# Altium PCB PCB.PCBDOC
Units mil, origin at the board's own origin, x right, y up, seen from the top; angles counter-clockwise.
Board outline 3937.01 x 1968.5 mil, 10 copper layers (TopLayer, MidLayer1, MidLayer2, MidLayer3, MidLayer4, MidLayer5, MidLayer6, MidLayer7, MidLayer8, BottomLayer); 21 components, 20 nets, 85 pads, 0 vias.
Unrouted connection lines stored in the file: 48.
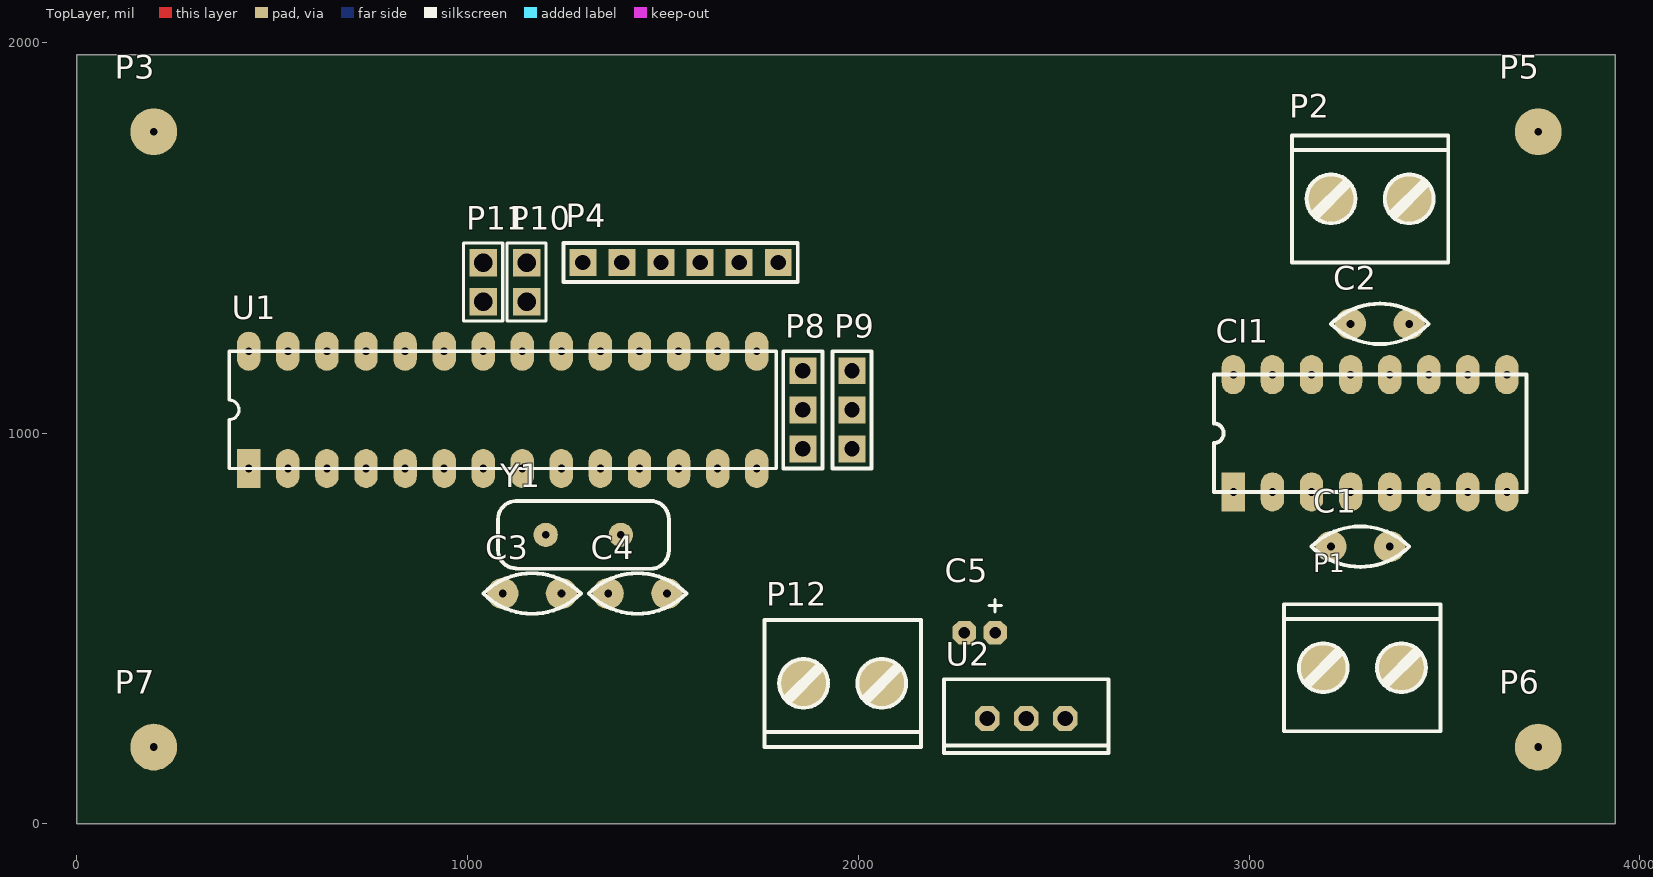
[diagram p0: TopLayer view]
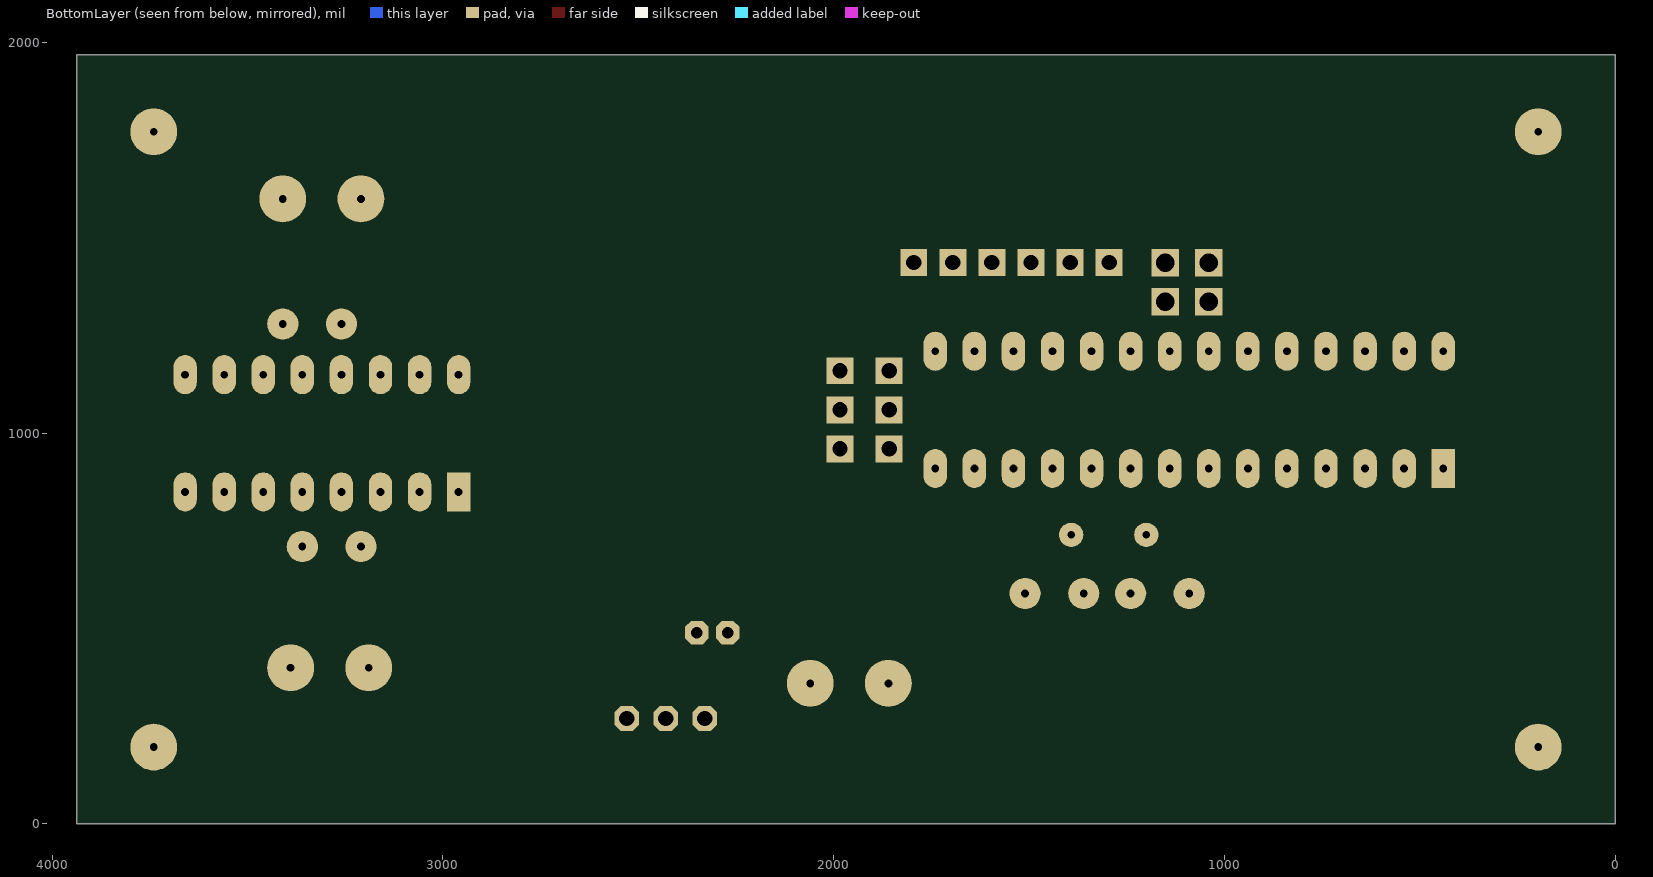
[diagram p1: BottomLayer view, seen from below]

## Layer stack, top to bottom
TopSolder: solder mask 0.4, Solder Resist, Dk 3.5
TopLayer: signal copper 1.4
Dielectric1: core 12.6, FR-4, Dk 4.8
MidLayer1: signal copper 1.4
Dielectric2: prepreg 12.6, FR-4, Dk 4.8
MidLayer2: signal copper 1.4
Dielectric3: core 12.6, FR-4, Dk 4.8
MidLayer3: signal copper 1.4
Dielectric4: prepreg 12.6, FR-4, Dk 4.8
MidLayer4: signal copper 1.4
Dielectric5: core 12.6, FR-4, Dk 4.8
MidLayer5: signal copper 1.4
Dielectric6: prepreg 12.6, FR-4, Dk 4.8
MidLayer6: signal copper 1.4
Dielectric7: core 12.6, FR-4, Dk 4.8
MidLayer7: signal copper 1.4
Dielectric8: prepreg 12.6, FR-4, Dk 4.8
MidLayer8: signal copper 1.4
Dielectric9: core 12.6, FR-4, Dk 4.8
BottomLayer: signal copper 1.4
BottomSolder: solder mask 0.4, Solder Resist, Dk 3.5

## Board outline
0,0 3937.01,0 3937.01,1968.5 0,1968.5

## Design rules (kind name [scope] priority, off if disabled: settings)
Clearance [All] p1: gap=25 ignorepadtopadclearanceinfootprint=FALSE
FabricationTestPointUsage TestPointUsage [All] p1: valid=0 allowmultiple=FALSE
FabricationTestpoint Testpoint [All] p1: side=3 testpointundercomponent=TRUE minsize=40 maxsize=100 preferedsize=60 minholesize=20 maxholesize=40 preferedholesize=32 testpointgrid=1 allowsidetop=TRUE allowsidebottom=TRUE usegrid=TRUE gridtolerance=0.01
PasteMaskExpansion PasteMaskExpansion_1 [InComponent('P1')] p1: expansion=-150
PasteMaskExpansion [All] p2: expansion=0
PlaneClearance [All] p1: clearance=10
PolygonConnect [All] p1: connectstyle=Relief reliefconductorwidth=10 reliefentries=4 polygonreliefangle="90 Angle" airgapwidth=10
RoutingVias [All] p1: holewidth=28 width=50 viastyle="Through Hole" minholewidth=28 minwidth=50 maxholewidth=28 maxwidth=50
SilkToSolderMaskClearance SilkscreenOverComponentPads [IsPad] p1: minsilkscreentomaskgap=10 clearancetoexposedcopper=TRUE
SolderMaskExpansion [All] p1: expansion=2
Width [All] p1: maxlimit=300 minlimit=20 preferedwidth=25
25 further rules are at their usual default settings.

## Components (designator, comment, footprint, x,y, rotation, side; value= is the part's Value field where it differs from the comment)
C1 "100nF" CAP0.15 3210,710 r270 top
C2 "100nF" CAP0.15 3260,1280 r270 top
C3 "22pF" CAP0.15 1240,590 r90 top
C4 "22pF" CAP0.15 1360,590 r270 top
C5 "Cap Pol" "ELECTROLITICO 5X10" 2350,490 r180 top value=220uF
CI1 "L293" DIP16 2960,850 r90 top
P1 "MOTOR1" "BORNERA2 azul" 3190,400 r0 top
P2 "MOTOR2" "BORNERA2 azul" 3210,1600 r0 top
P3 "POWER IN" TORNILLO 196.85,1771.65 r0 top
P4 "HC-05" "Header 1X6" 1795,1437 r180 top
P5 "POWER IN" TORNILLO 3740.16,1771.65 r0 top
P6 "POWER IN" TORNILLO 3740.16,196.85 r0 top
P7 "POWER IN" TORNILLO 196.85,196.85 r0 top
P8 "SERVO1" "Header 1X3" 1858,960 r90 top
P9 "SERVO2" "Header 1X3" 1984,960 r90 top
P10 "LUZ1" HEADER1X2 1151,1337 r90 top
P11 "LUZ2" HEADER1X2 1040,1337 r90 top
P12 "POWER IN" "BORNERA2 azul" 2060,360 r180 top
U1 "PIC16F876A-I/SO" DIP28 440,910 r90 top
U2 "LM78LXX" TO220 2430,270 r180 top
Y1 "5M" HP49-S 1200,740 r0 top

## Footprints (in the part's own frame and the unit in brackets; to place one, negate y for a bottom-side part, rotate by r counter-clockwise, add the part's x,y. Pads: shape width x height; smd on the part's side, far side on the other; paste and mask are expansions set on the pad)
"BORNERA2 azul" [mil]
  round 120 hole 20: 1(0,0) 2(200,0)
  silkscreen extent -100,-162 300,162, body extent -117,-122 300,178, height 394
CAP0.15 [mil]
  round 80 hole 20: 1(0,0) 2(0,150)
  silkscreen extent -52,-50 52,200, body extent -40,-22 39,172, height 267
DIP16 [mil]
  rect 100x60 hole 20: 1(0,0)
  oval 100x60 hole 20: 2(0,-100) 3(0,-200) 4(0,-300) 5(0,-400) 6(0,-500) 7(0,-600) 8(0,-700) 9(300,-700) 10(300,-600) 11(300,-500) 12(300,-400) 13(300,-300) 14(300,-200) 15(300,-100) 16(300,0)
  silkscreen extent 0,-750 300,50, body extent -2,-761 304,50, height 177
DIP28 [mil]
  rect 100x60 hole 20: 1(0,0)
  oval 100x60 hole 20: 2(0,-100) 3(0,-200) 4(0,-300) 5(0,-400) 6(0,-500) 7(0,-600) 8(0,-700) 9(0,-800) 10(0,-900) 11(0,-1000) 12(0,-1100) 13(0,-1200) 14(0,-1300) 15(300,-1300) 16(300,-1200) 17(300,-1100) 18(300,-1000) 19(300,-900) 20(300,-800) 21(300,-700) 22(300,-600) 23(300,-500) 24(300,-400) 25(300,-300) 26(300,-200) 27(300,-100) 28(300,0)
  silkscreen extent 0,-1350 300,50, body extent 4,-1341 312,39, height 180
"ELECTROLITICO 5X10" [mil]
  oct 60x60 hole 29.53: 1(0,0) 2(78.74,0)
  silkscreen extent -16,-85 16,-53, body extent -60,-99 139,99, height 123
HEADER1X2 [mm] "Connector; Header; 2 Position"
  rect 1.784x1.784 hole 1.2: 1(0,0) 2(2.54,0)
  silkscreen extent -1.27,-1.27 3.81,1.27, body extent -1.27,-1.27 3.81,1.27, height 8.44
"Header 1X3" [mm]
  rect 1.75x1.75 hole 1: 1(0,0) 2(2.54,0) 3(5.08,0)
  silkscreen extent -1.27,-1.27 6.35,1.27, body extent -1.27,-1.52 6.35,1.4, height 8.51
"Header 1X6" [mm]
  rect 1.75x1.75 hole 1: 1(0,0) 2(2.54,0) 3(5.08,0) 4(7.62,0) 5(10.16,0) 6(12.7,0)
  silkscreen extent -1.27,-1.27 13.95,1.27, body extent -1.27,-1.52 13.97,1.4, height 8.51
HP49-S [mil]
  round 62 hole 19.68: 1(0,0) 2(192.13,0)
  silkscreen extent -122,-87 315,87, body extent -127,-92 320,92, height 138
TO220 [mm]
  oct 1.6x1.6 hole 1: 1(-2.54,0) 2(0,0) 3(2.54,0)
  silkscreen extent -5.35,-2.55 5.35,2.25, body extent -4.95,-2.09 4.95,2.41, height 25.66
TORNILLO [mil]
  round 120 hole 20: 1(0,0)
  body extent -110,-114 110,107, height 94

## Part data
C1 C2 C3 C4: library part CAP
C5: "Polarized Capacitor (Surface Mount)", LatestRevisionDate=17-Jul-2002, LatestRevisionNote="Re-released for DXP Platform.", PackageReference=C0805, Published=8-Jun-2000, Publisher="Altium Limited"
CI1: "Driver_Motor", Code_JEDEC=SOT-23, LatestRevisionDate=17-Jul-2002, LatestRevisionNote="Re-released for DXP Platform.", PackageReference=SOT-23B, Published=8-Jun-2000, Publisher="Altium Limited"
P1 P2 P10 P11 P12: library part "Header 2", "Header, 2-Pin", LatestRevisionDate=17-Jul-2002, LatestRevisionNote="Re-released for DXP Platform.", Publisher="Altium Limited"
P3 P5 P6 P7: library part "Header 1", "Header, 2-Pin", LatestRevisionDate=17-Jul-2002, LatestRevisionNote="Re-released for DXP Platform.", Publisher="Altium Limited"
P4: library part "Header 6", "Header, 6-Pin", LatestRevisionDate=17-Jul-2002, LatestRevisionNote="Re-released for DXP Platform.", Publisher="Altium Limited"
P8 P9: library part "Header 3", "Header, 3-Pin", LatestRevisionDate=17-Jul-2002, LatestRevisionNote="Re-released for DXP Platform.", Publisher="Altium Limited"
U1: "Enhanced FLASH Microcontroller, 8K (x14-Bit words) FLASH, 368 Bytes RAM, 28-Pin SOIC, Standard VDD Range, Industrial Temperature", Supplier Part Number 1=PIC16F876A-I/SO-ND, Code_JEDEC=MS-013, ComponentAvailability="Unknown. Contact manufacturer to determine status.", ComponentLink1Description=Datasheet, ComponentLink1URL=http://ww1.microchip.com/downloads/en/DeviceDoc/39582b.pdf, ComponentLink2Description="Packaging Specification", ComponentLink2URL=http://www.microchip.com/stellent/groups/techpub_sg/documents/packagingspec/en012702.pdf, ComponentLink3Description="Microchip.com Home", ComponentLink3URL=http://www.microchip.com/, DatasheetVersion="revB, Oct-2003", LatestRevisionDate=29-Jan-2009, LatestRevisionNote="Sch. layout revised. 3D Model Removed.", PackageDescription="28-Lead Plastic Small Outline (SO) - Wide 7.50mm Body [SOIC]", PackageReference=SOIC-SO28, PackageVersion="revBB, Aug-2009", Published=11-Oct-2004, Publisher="Altium Limited", Supplier 1=Digi-Key, Supplier 2=Farnell, Supplier 3=Farnell, Supplier Part Number 2=9761306, Supplier Part Number 3=1660040
Y1: library part XTAL, "Crystal Oscillator", LatestRevisionDate=17-Jul-2002, LatestRevisionNote="Re-released for DXP Platform.", PackageReference=R38, Published=8-Jun-2000, Publisher="Altium Limited"

## Nets (pads, with @x,y where several pads share a name; then routed paths per layer and width w, separated by ;. In a path a pad name is that pad's centre, name@x,y a point inside that pad or via, vN(x,y) a via of type N, cw(c..) or ccw(c..) an arc to the next point about the centre after c; other vN are vias at no path point)
+5: C5.1 P4.5 P8.2 P9.2 U1.1 U1.20 U2.1
GND: C3.1 C4.1 C5.2 CI1.4 CI1.5 CI1.12 CI1.13 P4.4 P8.3 P9.3 P10.2 P11.2 P12.1 U1.8 U1.19 U2.2
NetC1_1: C1.1 CI1.3 P1.1
NetC1_2: C1.2 CI1.6 P1.2
NetC2_1: C2.1 CI1.14 P2.1
NetC2_2: C2.2 CI1.11 P2.2
NetC3_2: C3.2 U1.9 Y1.1
NetC4_2: C4.2 U1.10 Y1.2
NetCI1_1: CI1.1 CI1.9 U1.24
NetCI1_2: CI1.2 U1.28
NetCI1_7: CI1.7 U1.27
NetCI1_10: CI1.10 U1.26
NetCI1_15: CI1.15 U1.25
NetP4_2: P4.2 U1.17
NetP4_3: P4.3 U1.18
NetP8_1: P8.1 U1.11
NetP9_1: P9.1 U1.12
NetP10_1: P10.1 U1.21
NetP11_1: P11.1 U1.22
VCC: CI1.8 CI1.16 P12.2 U2.3
pads on no net: P3.1 P4.1 P4.6 P5.1 P6.1 P7.1 U1.2 U1.3 U1.4 U1.5 U1.6 U1.7 U1.13 U1.14 U1.15 U1.16 U1.23

## Silkscreen, mask and mechanical layers (free items; w line width, h text height)
Mechanical1:
  the board outline again, w10